# Altium PCB betterfc_v0.2.PcbDoc
Units mm, origin at the board's own origin, x right, y up, seen from the top; angles counter-clockwise.
Board outline 26 x 26 mm, 4 copper layers (Top Layer, Layer 1, Layer 2, Bottom Layer), stack 0.603 mm thick; 70 components, 60 nets, 253 pads, 108 vias.
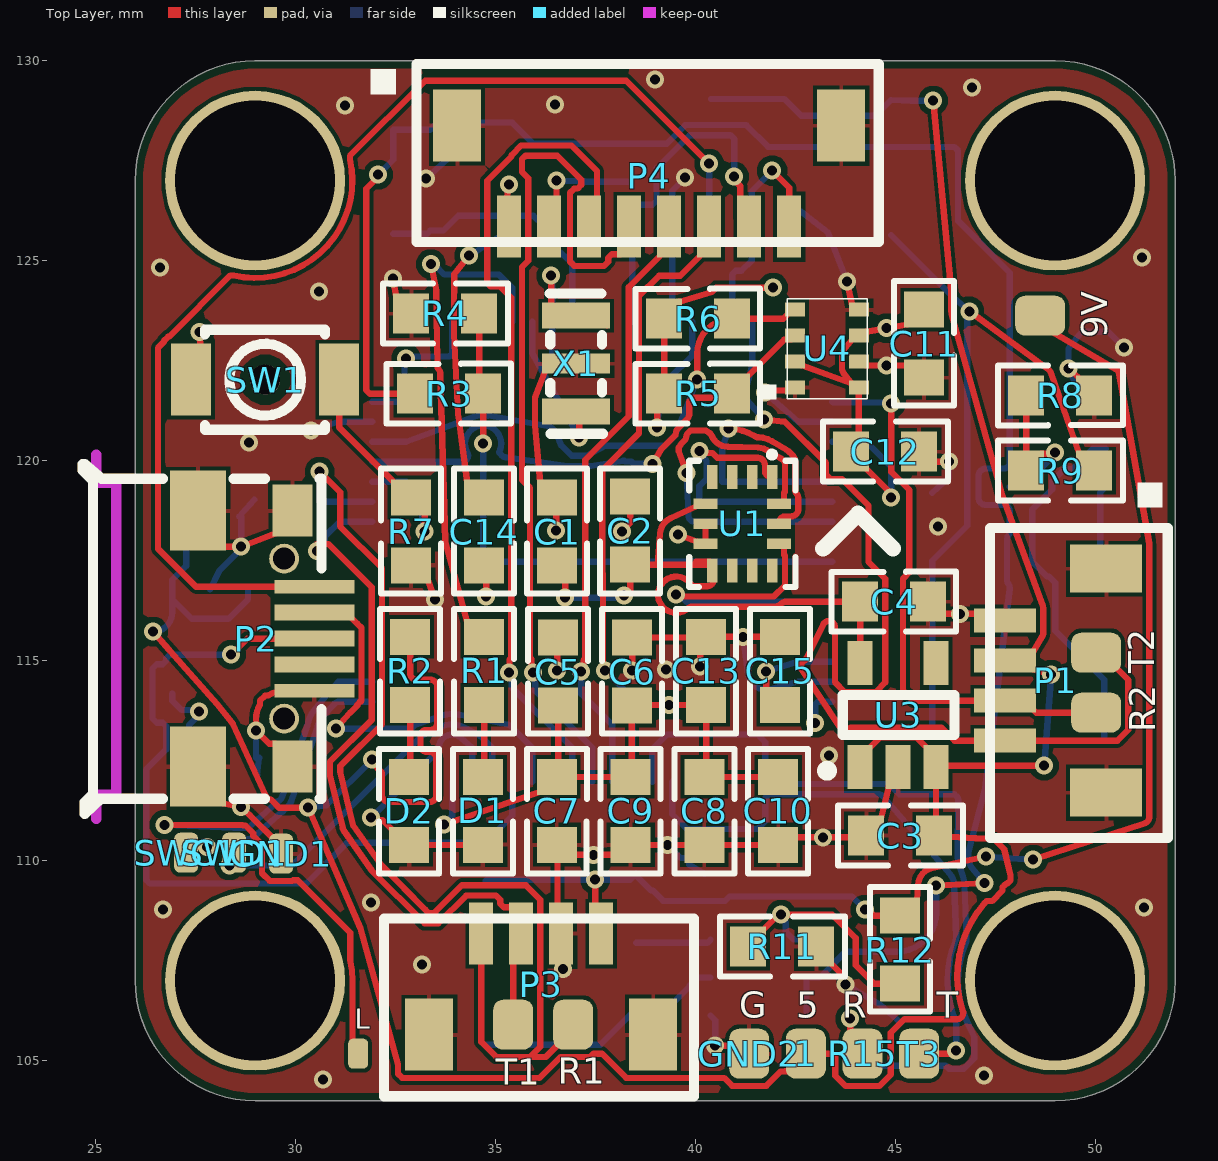
[diagram p0: Top Layer view]
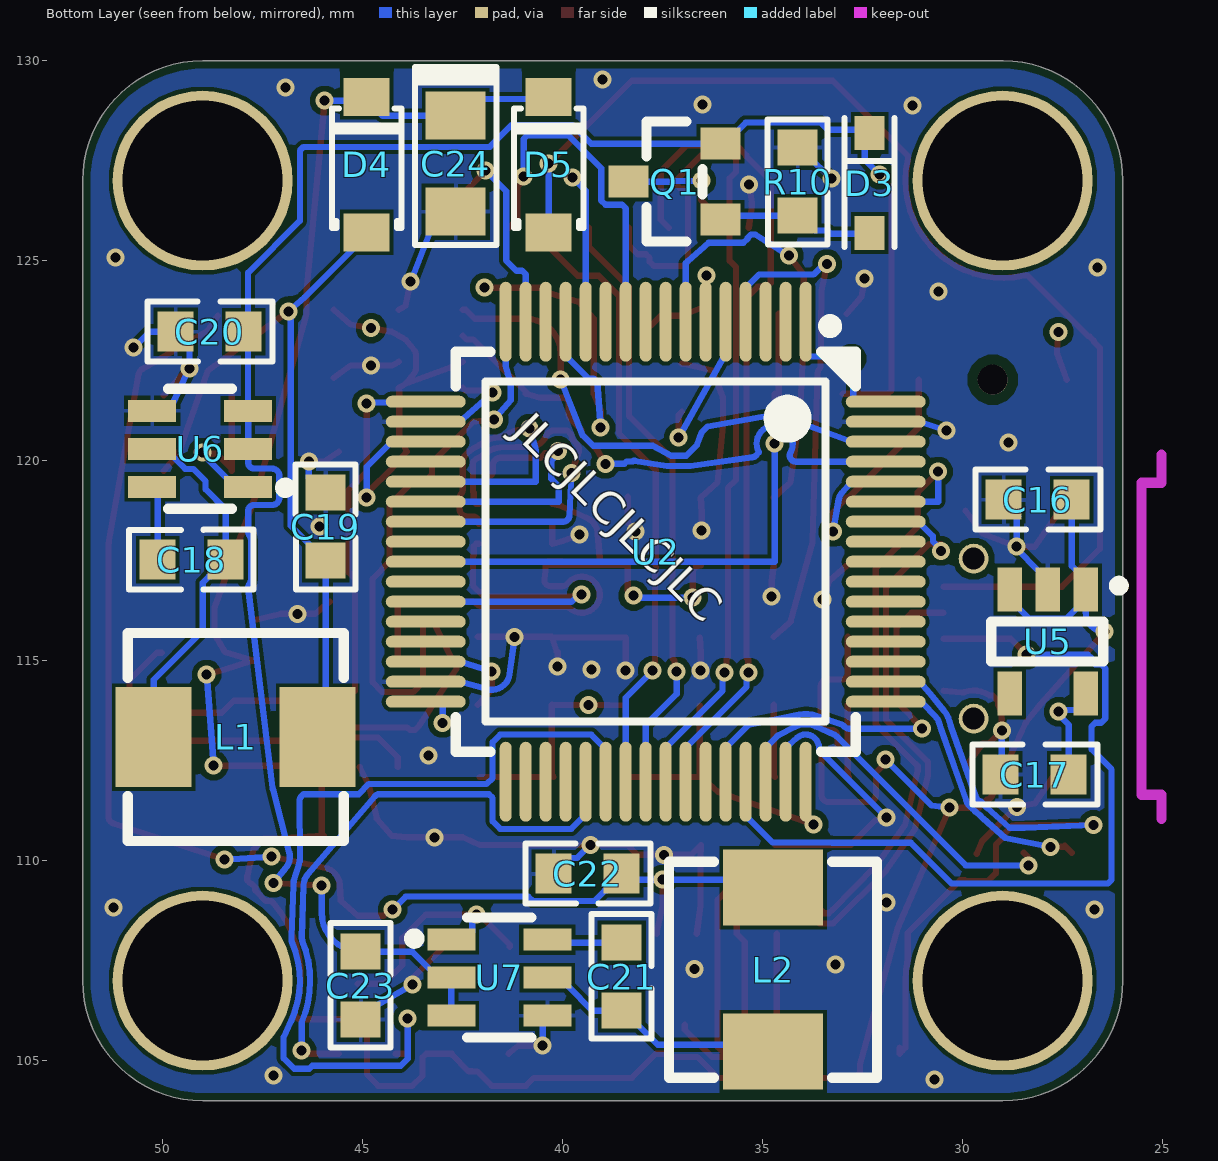
[diagram p1: Bottom Layer view, seen from below]
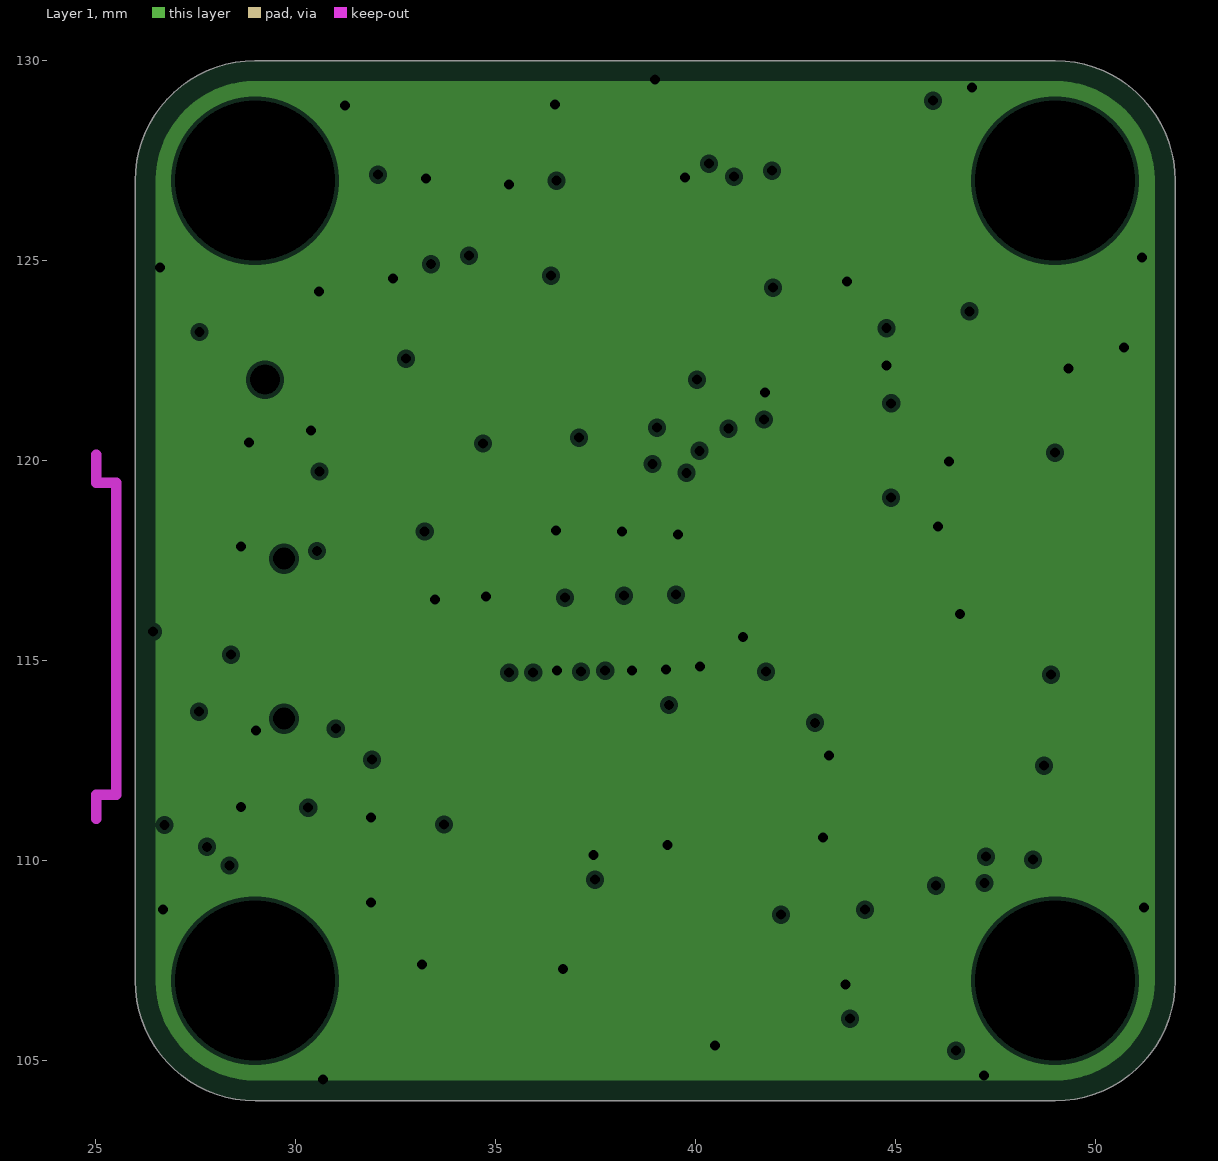
[diagram p2: Layer 1, clearances drawn from the general rule]
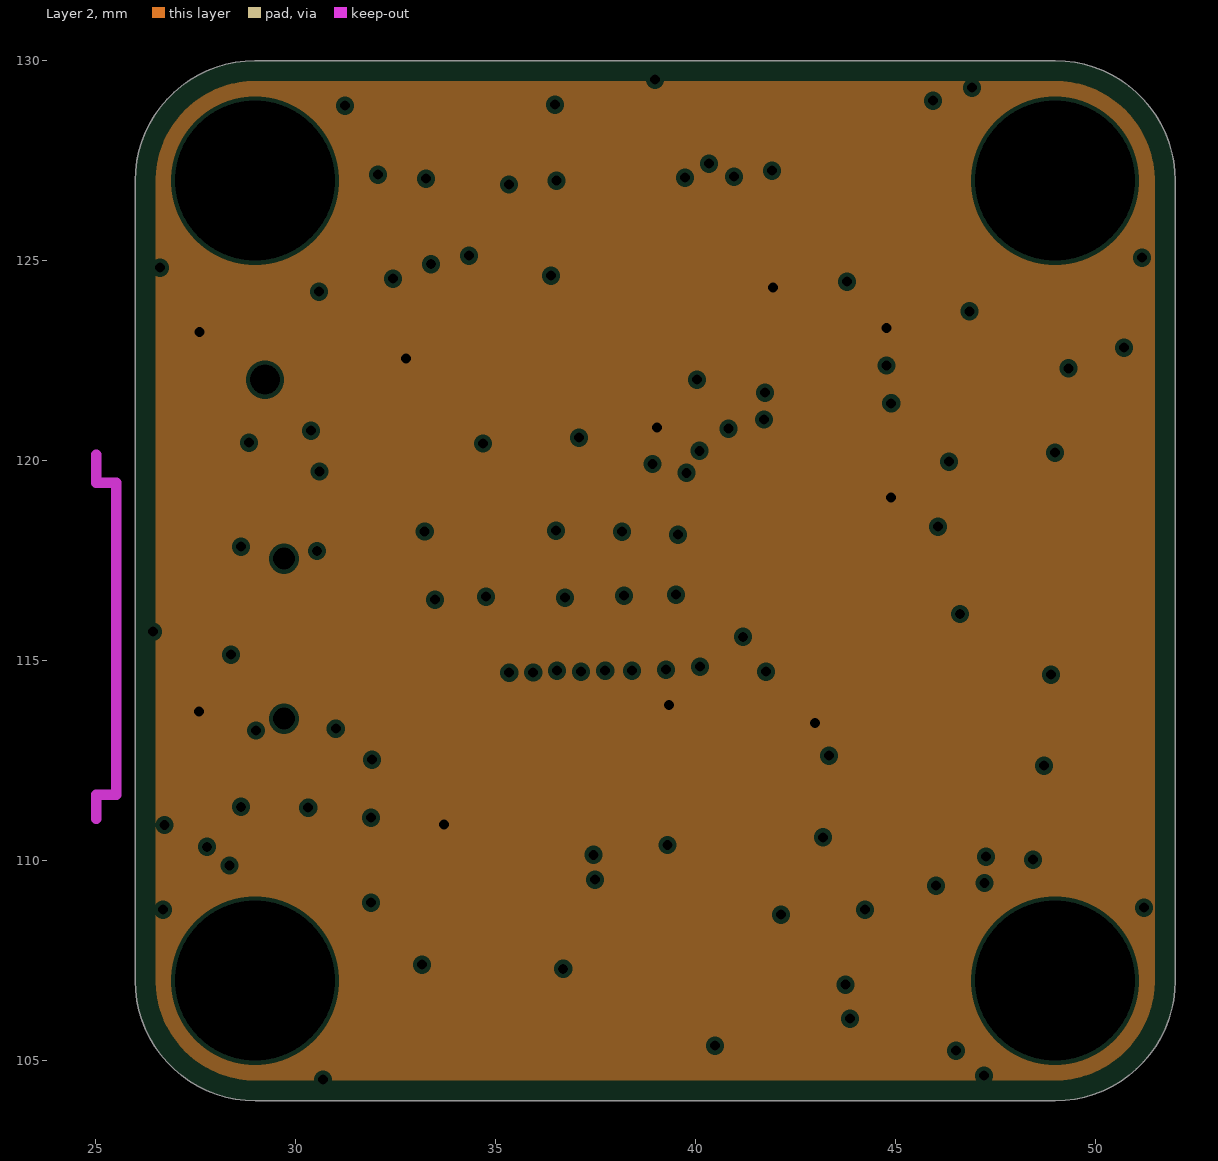
[diagram p3: Layer 2, clearances drawn from the general rule]

## Layer stack, top to bottom
Top Solder: solder mask 0.0102, Solder Resist, Dk 3.5
Top Layer: signal copper 0.0356
Dielectric 2: prepreg 0.0711, PP-006, Dk 4.1
Layer 1: plane copper 0.035, net GND
Dielectric 1: dielectric 0.32, FR-4, Dk 4.8
Layer 2: plane copper 0.035, net 3V3
Dielectric 3: prepreg 0.0711, PP-006, Dk 4.1
Bottom Layer: signal copper 0.0356
Bottom Solder: solder mask 0.0102, Solder Resist, Dk 3.5

## Board outline
29,104 cw(c29,107) 26,107 26,127 cw(c29,127) 29,130 49,130 cw(c49,127) 52,127 52,107 cw(c49,107) 49,104

## Design rules (kind name [scope] priority, off if disabled: settings)
BoardOutlineClearance [All] p1: gap=0.2 ignorepadtopadclearanceinfootprint=FALSE
Clearance [All] p1: gap=0.102 ignorepadtopadclearanceinfootprint=FALSE except(0.127: Arc-Via Track-Via SMDPad-Via THPad-Via Via-Via Via-Fill Via-Poly Via-Region Via-Text; 0.25: Arc-Hole Track-Hole SMDPad-Hole THPad-Hole Via-Hole Fill-Hole Poly-Hole Region-Hole Text-Hole)
ComponentClearance [All] p1: gap=0.102 collisioncheckmode=3 verticalgap=0.102 showdistances=TRUE
DiffPairsRouting [All] p1: maxlimit=0.102 minlimit=0.102 mostfreqgap=0.102 toplayer_minwidth=0.102 toplayer_maxwidth=1816.048 toplayer_prefwidth=0.102 bottomlayer_minwidth=0.102 bottomlayer_maxwidth=1816.048 bottomlayer_prefwidth=0.102 maxuncoupledlength=12.7
Height [All] p1: minheight=0 maxheight=1816.048 prefheight=12.7
HoleSize [All] p1: absolutevalues=TRUE maxlimit=6.3 minlimit=0.2 maxpercent=80.000 minpercent=20.000
HoleToHoleClearance [All] p1: gap=0.25 allowstackedmicrovias=FALSE
MinimumAnnularRing [All] p1: minimumring=0.076
MinimumSolderMaskSliver [All] p1: minsoldermaskwidth=0
PlaneClearance [All] p1: clearance=0.102
PlaneConnect PlaneConnectPowerPads [InPadClass('PowerPads')] p1: planeconnectstyle=Direct reliefexpansion=0.508 reliefentries=4 reliefconductorwidth=0.254 reliefairgap=0.254
PlaneConnect [All] p2: pad.planeconnectstyle=Relief pad.reliefexpansion=0.3 pad.reliefentries=4 pad.reliefconductorwidth=0.102 pad.reliefairgap=0.102 via.planeconnectstyle=Direct via.reliefexpansion=0.3 via.reliefentries=4 via.reliefconductorwidth=0.127 via.reliefairgap=0.127
PolygonConnect PolygonConnectPowerPads [All vs (InPadClass('PowerPads'))] p1: connectstyle=Direct reliefconductorwidth=0.254 reliefentries=4 polygonreliefangle="90 Angle" airgapwidth=0.254
PolygonConnect [All] p2: thpad.connectstyle=Relief thpad.reliefconductorwidth=0.102 thpad.reliefentries=4 thpad.polygonreliefangle="90 Angle" thpad.airgapwidth=0.102 smdpad.connectstyle=Relief smdpad.reliefconductorwidth=0.102 smdpad.reliefentries=4 smdpad.polygonreliefangle="90 Angle" smdpad.airgapwidth=0.102 via.connectstyle=Direct via.reliefconductorwidth=0.127 via.reliefentries=4 via.polygonreliefangle="90 Angle" via.airgapwidth=0.127
RoutingVias [All] p1: holewidth=0.2 width=0.45 viastyle="Through Hole" minholewidth=0.2 minwidth=0.45 maxholewidth=6.3 maxwidth=6.55
SilkToSilkClearance [All] p1: silktosilkclearance=0
SilkToSolderMaskClearance [IsPad] p1: minsilkscreentomaskgap=0.102 clearancetoexposedcopper=TRUE
SolderMaskExpansion [All] p1: expansion=0.075 istentingtop=FALSE
Width [All] p1: maxlimit=1816.048 minlimit=0.155 preferedwidth=0.155 minimp=50.000000 maximp=50.000000 favimp=50.000000
20 further rules are at their usual default settings.

## Components (designator, comment, footprint, x,y, rotation, side; value= is the part's Value field where it differs from the comment)
1 "PAD" pad#1 42.767,105.175 r0 top
9V "PAD" pad#1 48.625,123.625 r90 top
C1 "100nF" 0603 43.598,124.225 r90 top
C2 "100nF" 0603 31.327,112.255 r270 top
C3 "1uF (X7R)" 0603 51.12,103.577 r0 top
C4 "1uF (X7R)" 0603 38.98,123.523 r180 top
C5 "100nF" 0603 43.623,120.723 r90 top
C6 "100nF" 0603 45.473,120.723 r90 top
C7 "100nF" 0603 29.492,105.25 r270 top
C8 "100nF" 0603 33.182,105.25 r270 top
C9 "100nF" 0603 31.337,105.25 r270 top
C10 "4.7uF" 0603 35.027,105.25 r270 top
C11 "100nF" 0603 52.773,128.92 r90 top
C12 "100nF" 0603 50.745,113.177 r0 top
C13 "100nF" 0603 33.227,108.753 r270 top
C14 "1uF" 0603 41.773,124.225 r90 top
C15 "2.2uF" 0603 35.077,108.753 r270 top
C16 "1uF (X7R)" 0603 22.13,111.977 r180 bottom
C17 "1uF (X7R)" 0603 22.205,105.102 r180 bottom
C18 "100nF" 0603 55.27,124.573 r0 bottom
C19 "22uF" 0603 52.973,112.355 r270 bottom
C20 "10uF" 0603 42.83,116.177 r180 bottom
C21 "100nF" 0603 31.477,113.095 r90 bottom
C22 "22uF" 0603 33.38,102.627 r180 bottom
C23 "10uF" 0603 38.002,112.87 r90 bottom
C24 "100uF" "polorizedC - duplicate" 42.675,127.425 r90 bottom
D1 "LED1 (Blue - Status)" 0603 27.647,105.25 r270 top
D2 "LED2 (Red - PWR)" 0603 25.802,105.25 r270 top
D3 "Zenerdiode" Zenerdiode 32.325,125.692 r90 bottom (schematic designator D4)
D4 "B5819W_C305445" scottydiode 44.975,127.776 r90 bottom (schematic designator D3)
D5 "B5819W_C305445" scottydiode 40.424,127.776 r90 bottom
GND1 "PAD" pad#2 29.65,110.175 r0 top
GND2 "PAD" pad#1 41.35,105.175 r180 top
L "PAD" pad#3 31.575,105.175 r0 top
L1 "4.7uH" coil 48,112.65 r180 bottom
L2 "4.7uH" coil 34.3,107.45 r90 bottom
P1 "RXplug" RXplug 46.861,102.062 r270 top
P2 "MicroUSB" microUSB 31.072,119.766 r180 top
P3 "VTXplug" VTXplug 30.951,104.746 r180 top (schematic designator P1)
P4 "ESCplug" ESCplug 38.366,125.85 r0 top (schematic designator P3)
Q1 "mosfet" mosfet 36.95,127 r180 bottom
R1 "150" 0603 27.677,108.753 r270 top (schematic designator R2)
R1 "PAD" pad#1 36.95,105.9 r180 top
R2 "150" 0603 25.827,108.753 r270 top (schematic designator R4)
R2 "PAD" pad#1 50.025,113.7 r90 top
R3 "10k" 0603 27.855,128.723 r180 top (schematic designator R1)
R4 "1k" 0603 39.745,116.627 r0 top (schematic designator R3)
R5 "1k" 0603 34.08,128.723 r180 top
R6 "1k" 0603 34.08,130.598 r180 top
R7 "10k" 0603 39.948,124.225 r90 top
R8 "30k" 0603 55.12,114.587 r0 top
R9 "157k" 0603 55.12,112.702 r0 top
R10 "100k" 0603 41.173,120.98 r270 bottom
R11 "20k" 0603 48.17,100.802 r0 top
R12 "205k" 0603 52.173,113.77 r90 top
R15 "PAD" pad#1 44.183,105.175 r180 top
SW1 "button" button 32.996,121.791 r0 top
SWC1 "PAD" pad#2 27.275,110.2 r180 top
SWD1 "PAD" pad#2 28.475,110.2 r180 top
T1 "PAD" pad#1 35.45,105.9 r0 top
T2 "PAD" pad#1 50.025,115.2 r90 top
T3 "PAD" pad#1 45.6,105.175 r180 top
U1 "BMI270" bmi270 41.275,118.05 r90 top
U2 "stm32f722" STM32F722RET6 37.275,117.617 r0 bottom
U3 "AP2112K-3.3TRG1" LDO 44.95,113.825 r270 top
U4 "bmp280" bmp280 43.3,122.8 r180 top
U5 "AP2112K-3.3TRG1" LDO 27.75,115.3 r90 bottom
U6 "AP63205WU-7" AP63205WU-7 48.925,120.225 r90 bottom
U7 "AP63205WU-7" AP63205WU-7 41.725,107.15 r270 bottom
X1 "8Mhz" crystal 38.51,122.45 r90 top

## Footprints (in the part's own frame and the unit in brackets; to place one, negate y for a bottom-side part, rotate by r counter-clockwise, add the part's x,y. Pads: shape width x height; smd on the part's side, far side on the other; paste and mask are expansions set on the pad)
0603 [mm]
  rect 0.9x1 smd paste+0 mask+0.051: 1(-6.845,7.048) 2(-5.145,7.048)
  silkscreen extent -7.54,6.3 -4.43,7.8
AP63205WU-7 [mm]
  rect 0.55x1.2 smd paste+0 mask+0.051: 1(-0.877,-1.061) 2(0.073,-1.061) 3(1.022,-1.061) 4(1.022,1.339) 5(0.073,1.339) 6(-0.877,1.339)
  silkscreen extent -1.43,-2.11 1.57,0.94
bmi270 [mm]
  rect 0.6x0.27 smd paste+0 mask+0.051: 1(1.543,-0.654) 2(1.543,-0.154) 3(1.543,0.346) 4(1.543,0.846) 8(-0.797,0.846) 9(-0.797,0.346) 10(-0.797,-0.154) 11(-0.797,-0.654)
  rect 0.27x0.6 smd paste+0 mask+0.051: 5(0.873,1.016) 6(0.373,1.016) 7(-0.127,1.016) 12(-0.127,-0.824) 13(0.373,-0.824) 14(0.873,-0.824)
  silkscreen extent -1.2,-1.23 2.18,1.42
bmp280 [mm]
  rect 0.5x0.35 smd: 1(0.8,0.975) 2(0.8,0.325) 3(0.8,-0.325) 4(0.8,-0.975) 5(-0.8,-0.975) 6(-0.8,-0.325) 7(-0.8,0.325) 8(-0.8,0.975)
  silkscreen extent -1,-1.25 1.65,1.27
button [mm]
  rect 1x1.8 smd paste+0 mask+0.051: 1(-5.596,0.234) 2(-1.896,0.234)
  round 0.75 hole 0.75 unplated paste+0: ""(-3.746,0.234)
  silkscreen extent -5.25,-1.02 -2.25,1.48
coil [mm]
  rect 1.9x2.5 smd paste+0 mask+0.051: 1(-2.225,0.441) 2(1.875,0.441)
  silkscreen extent -2.87,-2.16 2.53,3.04
crystal [mm]
  rect 0.65x1.7 smd paste+0 mask+0.051: 1(-1.225,1.485) 3(1.175,1.485)
  rect 0.5x1.7 smd paste+0 mask+0.051: 2(-0.025,1.485)
  silkscreen extent -1.78,0.82 1.73,2.15
ESCplug [mm]
  rect 0.6x1.55 smd: 1(-3.016,0) 2(-2.016,0) 3(-1.016,0) 4(-0.016,0) 5(0.984,0) 6(1.984,0) 7(2.984,0) 8(3.984,0)
  rect 1.2x1.8 smd: 9(-4.316,2.525) 10(5.284,2.525)
  silkscreen extent -6.48,-0.38 6.22,4.06
LDO [mil]
  rect 43.5x24.5 smd paste+0 mask+2: 1(58.25,-32.48) 2(58.25,4.89) 3(58.25,42.3) 4(-44.11,42.3) 5(-44.11,-32.48)
  silkscreen extent -13,-70 67,60
microUSB [mm]
  rect 2x0.34 smd paste+0 mask+0.051: 1(0.592,2.916) 5(0.592,5.516)
  rect 2x0.4 smd paste+0 mask+0.051: 2(0.592,3.566) 3(0.592,4.216) 4(0.592,4.866)
  rect 1x1.3 smd paste+0 mask+0.051: 6(1.143,1.016) 9(1.143,7.416)
  rect 1.4x2 smd paste+0 mask+0.051: 7(3.497,1.016) 8(3.497,7.416)
  round 0.75 hole 0.55 unplated paste+0: ""(1.347,6.216) ""(1.347,2.216)
  Keep-Out Layer lines w0.254: 6.045,8.716 6.045,8.116 5.545,8.116 5.545,8.016 5.545,0.316 6.045,0.316 6.045,-0.384
  silkscreen extent 0.41,-0.15 6.38,8.59
mosfet [mm]
  rect 1x0.8 smd paste+0 mask+0.051: 1(0.895,-0.974) 2(0.895,0.926) 3(-1.405,-0.024)
  silkscreen extent -0.96,-1.52 0.44,1.48
pad#1 [mm]
  rrect50% 1x1.25 smd: 1(0,0)
pad#2 [mm]
  rrect50% 0.6x1 smd: 1(0,0)
pad#3 [mm]
  rrect50% 0.5x0.75 smd: 1(0,0)
"polorizedC - duplicate" [mm]
  rect 1.2x1.5 smd paste+0 mask+0.051: 1(-1.2,0) 2(1.2,0)
  silkscreen extent -2.03,-1.02 2.41,1.02
RXplug [mm]
  rect 0.6x1.55 smd: 1(-13.938,0.889) 2(-12.938,0.889) 3(-11.938,0.889) 4(-10.938,0.889)
  rect 1.2x1.8 smd: 5(-15.238,3.414) 6(-9.638,3.414)
  silkscreen extent -17.4,0.51 -8.51,4.95
scottydiode [mm]
  rect 0.95x1.15 smd paste+0 mask+0.051: 1(-2.065,-0.074) 2(1.32,-0.074)
  silkscreen extent -1.95,-0.94 1.03,0.79
STM32F722RET6 [mm]
  oval 0.3x2 smd paste+0 mask+0.051: 1(-3.35,-5.858) 2(-2.85,-5.858) 3(-2.35,-5.858) 4(-1.85,-5.858) 5(-1.35,-5.858) 6(-0.85,-5.858) 7(-0.35,-5.858) 8(0.15,-5.858) 9(0.65,-5.858) 10(1.15,-5.858) 11(1.65,-5.858) 12(2.15,-5.858) 13(2.65,-5.858) 14(3.15,-5.858) 15(3.65,-5.858) 16(4.15,-5.858) 33(4.15,5.642) 34(3.65,5.642) 35(3.15,5.642) 36(2.65,5.642) 37(2.15,5.642) 38(1.65,5.642) 39(1.15,5.642) 40(0.65,5.642) 41(0.15,5.642) 42(-0.35,5.642) 43(-0.85,5.642) 44(-1.35,5.642) 45(-1.85,5.642) 46(-2.35,5.642) 47(-2.85,5.642) 48(-3.35,5.642)
  oval 2x0.3 smd paste+0 mask+0.051: 17(6.15,-3.858) 18(6.15,-3.358) 19(6.15,-2.858) 20(6.15,-2.358) 21(6.15,-1.858) 22(6.15,-1.358) 23(6.15,-0.858) 24(6.15,-0.358) 25(6.15,0.142) 26(6.15,0.642) 27(6.15,1.142) 28(6.15,1.642) 29(6.15,2.142) 30(6.15,2.642) 31(6.15,3.142) 32(6.15,3.642) 49(-5.35,3.642) 50(-5.35,3.142) 51(-5.35,2.642) 52(-5.35,2.142) 53(-5.35,1.642) 54(-5.35,1.142) 55(-5.35,0.642) 56(-5.35,0.142) 57(-5.35,-0.358) 58(-5.35,-0.858) 59(-5.35,-1.358) 60(-5.35,-1.858) 61(-5.35,-2.358) 62(-5.35,-2.858) 63(-5.35,-3.358) 64(-5.35,-3.858)
  silkscreen extent -4.6,-5.9 5.4,4.89
VTXplug [mm]
  rect 0.6x1.55 smd: 1(-6.699,-3.429) 2(-5.699,-3.429) 3(-4.699,-3.429) 4(-3.699,-3.429)
  rect 1.2x1.8 smd: 5(-7.999,-0.904) 6(-2.399,-0.904)
  silkscreen extent -9.02,-3.81 -1.27,0.63
Zenerdiode [mm]
  rect 0.85x0.75 smd: 1(0,0) 2(2.5,0)
  silkscreen extent -0.35,-0.63 2.88,0.63

## Part data
C1 C2 C3 C4 C5 C6 C7 C8 C9 C10 C11 C12 C13 C14 C15 C16 C17 C18 C19 C20 C21 C22 C23: library part C
C24: library part "polorized C"
D1 D2: library part LED
D4 D5: library part ScottyDiode
L1 L2: library part coil
P2: library part USB-C_1
R1 R2 R3 R4 R5 R6 R7 R8 R9 R10 R11 R12: library part R
U3 U5: library part LDO
X1: library part Crystal

## Free pads (board coordinates)
  round 4.5 hole 4: ""(29,107) ""(29,127) ""(49,107) ""(49,127)

## Via types
v1: diameter 0.45, hole 0.25, Top Layer to Bottom Layer, 108 vias

## Nets (pads, with @x,y where several pads share a name; then routed paths per layer and width w, separated by ;. In a path a pad name is that pad's centre, name@x,y a point inside that pad or via, vN(x,y) a via of type N, cw(c..) or ccw(c..) an arc to the next point about the centre after c; other vN are vias at no path point)
3V3: C5.1 C6.1 C7.1 C8.1 C9.1 C10.1 C11.2 C12.1 C13.2 C17.2 R5.2 R6.2 SW1.1 U2.1 U2.13 U2.19 U2.32 U2.48 U2.64 U4.2 U4.6 U4.8 U5.5 | length 43.3
  Top Layer w0.155: SW1.1 27.64,122.683 27.64,122.774 v1(27.607,123.218) ; v1(33.725,110.907) 36.118,111.722 C7.1 C9.1 38.417,112.467 38.417,113.505 C6.1 38.847,113.893 v1(39.35,113.893) 39.852,113.893 C13.2 C8.1@40.275,112.14 ; C7.1@36.575,112.13 C5.1 ; v1(39.05,120.825) 39.05,121.253 R5.2 R6.2 39.597,123.972 40.423,124.221 40.527,124.325 v1(41.95,124.325) ; C8.1 C8.1@40.275,112.14 ; C10.1 40.32,112.095 C8.1@40.275,112.14 ; U4.2 42.672,122.377 U4.8@43.928,121.923 ; v1(44.9,119.075) 44.844,119.131 44.844,119.231 44.272,119.803 C12.1 44.088,120.647 44.088,121.728 U4.8 U4.8@43.928,121.923 ; C11.2 45.303,123.403 v1(44.788,123.313) 44.272,123.223 U4.6 43.928,123.028 43.711,122.763 ccw(c43.85,122.65) 43.671,122.65 43.671,122.3 ccw(c43.85,122.3) 43.711,122.187 U4.8@43.928,121.923
  Bottom Layer w0.155: U5.5 26.925,113.999 27.159,113.766 27.559,113.766 v1(27.6,113.725) ; C17.2 27.35,113.395 27.6,113.645 v1@27.6,113.675 ; U2.64 32.669,121.475 32.736,121.542 32.736,122.414 32.798,122.475 v1@32.85,122.475 ; v1(32.775,122.55) v1@32.85,122.475 ; v1(33.725,110.907) 33.925,111.125 U2.48 ; U2.1 33.925,122.673 33.858,122.606 32.911,122.606 32.85,122.545 v1@32.85,122.475 ; v1(39.05,120.825) 39.137,121.966 39.183,122.011 39.228,122.056 39.356,122.056 39.925,122.625 U2.13 ; v1(43,113.447) 43,113.908 43.067,113.975 U2.32 ; U2.19 44.275,120.475 44.9,119.85 v1(44.9,119.075)
3V3_IMU: C1.1 C2.2 C4.2 U1.5 U1.8 U3.5 | length 17.2
  Top Layer w0.155: C1.1 cw(c36.55,117.18) 36.75,117.18 v1(36.75,116.575) ; v1(38.225,116.625) ccw(c38.225,116.775) 38.375,116.775 C2.2 39.062,117.4 ; 40.018,117.476 40.371,117.476 40.429,117.418 U1.8 40.458,117.031 40.458,116.999 cw(c40.304,117.018) 40.305,116.863 40.007,116.863 cw(c40.008,117.018) 39.886,116.923 ccw(c39.525,116.65) 39.825,116.312 cw(c39.927,116.195) 39.926,116.35 41.971,116.35 ccw(c41.971,116.606) 42.153,116.425 42.157,116.43 cw(c42.266,116.32) 42.266,116.475 C4.2 U3.5 ; U1.5@40.094,118.923 U1.5 40.037,118.865 39.383,118.56 ccw(c39.575,118.15) 39.124,118.185 39.062,117.4 ; U1.8@40.371,117.4 39.062,117.4
  Bottom Layer w0.155: v1(36.75,116.575) 38.175,116.575 ccw(c38.175,116.625) v1(38.225,116.625)
4V5: D5.1 P2.1 | length 29.4
  Top Layer w0.155: P2.1 27.521,116.85 26.571,117.8 26.571,122.821 26.721,122.971 26.721,122.999 26.826,123.104 26.854,123.104 28.381,124.631 28.445,124.631 28.462,124.631 ccw(c29,127) 31.369,127.538 31.369,127.555 31.369,127.619 33.25,129.5 38.275,129.5 v1(40.35,127.425)
  Bottom Layer w0.155: v1(40.35,127.425) D5.1 D5.1@40.401,125.66
5V: 1.1 C3.2 C16.2 C24.2 D4.2 D5.2 P1.2 R2.1@32.875,115.597 U3.1 U3.3 U5.1 U5.3 | length 84.3
  Top Layer w0.155: v1(26.45,115.725) 26.843,115.272 26.875,115.235 28.053,113.912 28.411,113.465 cw(c28.275,113.35) 28.437,113.425 29.266,111.625 ccw(c29.429,111.7) 29.397,111.523 29.596,111.325 29.791,111.325 v1(30.326,111.324) 31.632,108.306 32.571,104.911 32.571,104.676 32.676,104.571 36.109,104.571 36.634,105.096 37.378,105.096 37.457,105.175 37.65,105.175 37.672,105.175 38.276,104.571 40.722,104.571 40.922,104.371 41.778,104.371 42.14,104.733 42.253,104.733 ; v1(31.925,112.525) 31.925,112.445 32.171,112.199 32.171,111.645 ccw(c32.35,111.645) 32.35,111.466 33.35,111.466 ccw(c33.35,111.645) 33.529,111.645 33.529,112.545 ccw(c33.35,112.545) 33.35,112.724 33.287,112.724 cw(c33.287,112.879) 33.132,112.879 33.132,113.113 cw(c33.287,113.113) 33.287,113.268 33.375,113.268 ccw(c33.375,113.447) 33.554,113.447 33.554,114.347 ccw(c33.375,114.347) 33.375,114.527 33.03,114.527 cw(c33.03,114.682) 32.875,114.682 R2.1@32.875,115.597 ; 42.254,104.734 42.357,104.734 42.767,105.143 1.1 43.413,105.175 43.504,105.084 43.504,104.622 43.756,104.371 44.611,104.371 44.892,104.651 44.892,105.699 45.23,106.037 46.545,106.037 ; U3.1 44.125,112.587 44.615,113.077 45.534,113.077 46.024,112.587 U3.3 ; v1(45.95,129) 46.403,124.242 cw(c46.225,124.225) 46.404,124.225 46.404,123.736 ccw(c46.857,123.736) 46.421,123.615 47.653,119.202 ccw(c47.825,119.25) 47.657,119.188 48.693,116.362 cw(c48.525,116.3) 48.704,116.3 48.704,115.7 cw(c48.525,115.7) 48.679,115.608 48.448,115.223 P1.2 48.448,114.778 v1(48.9,114.65) ; 46.546,106.037 ccw(c46.545,106.192) 46.655,106.082 ccw(c46.545,106.192) 46.7,106.192 46.7,106.217 cw(c49.332,107.113) 47.235,108.938 cw(c49.332,107.113) 47.238,108.942 47.242,108.945 47.288,108.991 47.422,108.991 47.687,109.256 47.687,109.338 47.732,109.383 ; 47.732,109.384 47.742,109.393 cw(c49.332,107.113) 47.754,109.401 cw(c49.332,107.113) 47.815,109.443 cw(c49.332,107.113) 47.829,109.451 47.84,109.463 47.886,109.508 47.886,109.572 47.886,109.631 47.728,110.287 47.462,110.553 47.017,110.559 47.006,110.56 C3.2 46.024,110.674 U3.3 ; v1(48.725,112.375) 46.258,112.375 U3.3
  Bottom Layer w0.155: v1(26.45,115.725) ccw(c26.45,116.2) 26.925,116.2 U5.1@26.925,116.538 ; C16.2 27.275,117.371 26.925,117.021 U5.1 U5.1@26.925,116.538 ; U5.3 28.824,116.538 28.334,116.048 27.415,116.048 U5.1@26.925,116.538 ; v1(30.326,111.324) 30.781,111.381 v1(31.925,112.525) ; D5.2@40.401,129.045 42.23,129.045 42.65,128.625 44.506,128.625 44.901,129.02 45.399,129 v1(45.95,129) ; v1(48.725,112.375) v1(48.9,114.65)
5V_REG: C19.2 D4.1 L1.2 R9.2 | length 19.1
  Top Layer w0.155: v1(46.857,123.736) 48.831,122.279 cw(c48.725,122.135) 48.894,122.194 49.603,120.172 R9.2
  Bottom Layer w0.155: D4.1@44.901,125.635 46.45,124.086 ccw(c46.559,124.197) 46.458,124.079 v1(46.857,123.736) ; L1.2 45.925,113.291 C19.2 46.8,118.375 v1@46.8,123.736
9V: 9V.1 C22.2 L2.2 P3.1 R12.2 | length 33.3
  Top Layer w0.155: v1(37.5,109.525) 37.5,108.873 P3.1 ; v1(44.25,108.775) 44.327,108.775 44.477,108.625 R12.2 45.547,108.997 45.573,109.404 cw(c46.025,109.375) 45.932,109.818 v1(47.275,110.1) ; v1(48.45,110.025) 51.23,110.93 ccw(c51.175,111.1) 51.354,111.1 51.354,117.9 ccw(c51.175,117.9) 51.351,117.931 50.601,122.166 ccw(c50.425,122.135) 50.515,122.29 48.875,123.25 9V.1
  Bottom Layer w0.155: L2.2@34.766,109.5 34.791,109.525 v1(37.5,109.525) 38.375,109.525 C22.2 38.525,109.625 38.897,109.253 38.947,109.253 39.204,108.996 40.749,108.996 40.856,109.103 43.922,109.103 v1(44.25,108.775) ; v1@47.319,110.17 v1(47.275,110.1) 47.315,110.097 v1(48.45,110.025)
GND: C1.2 C2.1 C3.1 C4.1 C5.2 C6.2 C7.2 C8.2 C9.2 C10.2 C11.1 C12.2 C13.1 C14.1 C15.1 C16.1 C17.1 C19.1 C20.1 C22.1 C23.1 C24.1 D1.2 D2.2 GND1.1 GND2.1 P1.1 P1.5 P1.6 P2.5 P2.6 P2.7 P2.8 P2.9 P3.2 P3.5 P3.6 P4.1 P4.9 P4.10 R4.1 R7.1 R8.2 R10.1 R11.2 U1.6 U1.7 U2.12 U2.18 U2.31 U2.47 U2.63 U3.2 U4.1 U4.5 U4.7 U5.2 U6.4 U7.4 X1.2 | length 82.4
  Top Layer w0.155: P2.8 28.197,111.427 v1(28.642,111.348) ; P2.7 28.197,117.85 v1(28.65,117.85) 29.506,118.177 P2.6 ; v1@28.642,111.275 v1(28.642,111.348) ; GND1.1 29.514,110.493 28.868,111.136 28.733,111.258 v1(28.642,111.348) ; P2.9 29.506,112.922 29.353,112.922 28.975,113.3 29.032,113.357 29.032,113.421 29.032,113.434 cw(c29.725,113.55) 29.12,113.908 29.12,113.998 29.248,114.126 29.335,114.135 cw(c29.725,113.55) 29.961,114.212 ccw(c30.012,114.358) 30.026,114.204 P2.5 ; v1(31.9,111.075) 31.956,111.019 32.176,111.019 32.8,110.395 D1.2 ; v1(32.45,124.55) 32.528,124.097 R4.1 ; R7.1 33.322,117.008 v1(33.5,116.525) ; C14.1 34.775,117.008 v1(34.775,116.6) ; v1(35.345,126.905) 35.272,126.445 35.272,126.37 P4.1@35.35,125.825 ; v1(36.525,118.25) 36.525,118.708 C1.2 36.127,119.453 35.997,120.884 cw(c36.175,120.9) 35.996,120.9 35.996,121.55 cw(c36.175,121.55) 36.008,121.614 36.253,122.253 X1.2 ; v1(36.55,114.75) 36.55,115.205 C5.2 ; P3.2 36.558,108.873 36.558,110.022 C7.2 36.787,110.148 38.138,110.148 C9.2 C8.2 C10.2 42.497,110.586 43.903,110.586 C3.1 44.647,111.047 44.84,111.871 U3.2 ; v1(38.175,118.225) 38.175,118.252 38.375,118.452 C2.1 ; v1(38.425,114.75) 38.425,115.205 C6.2 40.255,115.578 C13.1 ; v1(39.575,118.15) 40.037,117.981 U1.7 U1.6 ; v1(40.125,114.85) 40.125,115.225 40.15,115.225 C13.1 ; v1(40.5,105.375) 41.1,105.375 GND2.1 ; v1(41.75,121.7) 41.806,121.756 42.431,121.756 U4.1 ; C15.1 v1(41.2,115.597) C13.1 ; R11.2 43.025,107.8 43.705,107.12 43.705,106.956 v1(43.761,106.9) ; v1(43.8,124.475) 43.928,123.873 U4.5 ; U4.7 44.272,122.377 45.303,122.377 C11.1 ; C12.2 45.972,119.975 v1(46.347,119.975) ; C4.1 46.197,116.172 47.053,116.172 P1.1 ; v1(49.332,122.311) 49.603,122.057 R8.2
  Bottom Layer w0.155: U5.2 28.108,117.255 28.65,117.796 v1(28.65,117.85) ; v1@28.603,117.878 28.65,117.925 28.65,118.603 28.603,118.603 C16.1 ; v1(29.023,113.252) 29.023,112.572 29.1,112.572 C17.1 ; v1(30.4,120.75) 31.075,120.975 U2.63 ; v1(31.9,111.075) 33.596,112.771 33.596,112.886 33.603,112.894 cw(c33.925,112.825) 34.141,113.073 34.425,112.825 U2.47 ; v1(33.275,127.05) 33.703,127.453 R10.1 ; v1(39.308,110.395) 39.631,110.071 39.853,110.071 39.853,109.9 C22.1 ; U2.12 39.425,126.75 v1(39.75,127.075) ; U7.4 40.5,106.014 v1(40.5,105.375) ; v1(41.2,115.597) 41.327,114.664 ccw(c41.775,114.725) 41.895,114.289 42.575,114.475 U2.31 ; v1(41.75,121.7) 42.575,120.975 U2.18 ; C24.1@42.65,126.225 43.322,125.703 v1(43.8,124.475) ; v1(43.761,106.9) 44.628,106.397 C23.1 ; C19.1 46.347,119.572 v1(46.347,119.975) ; U6.4 49.741,121.445 v1(49.332,122.311) 49.332,122.803 C20.1 50.325,123.225 v1(50.725,122.825)
  other v1: 30.7,104.525 47.225,104.625 36.701,107.299 33.175,107.4 26.7,108.775 51.225,108.825 31.9,108.95 37.463,110.148 43.2,110.586 43.35,112.625 39.275,114.775 46.625,116.172 46.075,118.35 28.85,120.45 44.788,122.377 30.6,124.225 26.625,124.825 51.175,125.075 31.25,128.875 36.5,128.9 46.925,129.325 39,129.525
NetC14_2: C14.2 U2.7 | length 10.9
  Top Layer w0.155: v1(34.347,125.125) 33.975,124.661 33.975,124.212 ccw(c34.15,124.175) 33.971,124.175 33.971,123.175 ccw(c34.15,123.175) 33.971,123.166 34.071,121.166 ccw(c34.25,121.175) 34.072,121.152 34.081,121.091 34.303,119.458 34.346,119.414 C14.2
  Bottom Layer w0.155: v1(34.347,125.125) 35.185,125.654 35.294,125.654 35.34,125.609 35.376,125.573 35.376,125.552 35.481,125.447 36.352,125.447 36.876,124.989 36.879,124.985 36.925,124.939 U2.7
NetC15_2: C15.2 U2.30 | length 2.7
  Top Layer w0.155: v1(41.775,114.725) 41.775,114.27 C15.2
  Bottom Layer w0.155: v1(41.775,114.725) 42.575,114.975 U2.30
NetC18_1: C18.1 L1.1 U6.5 | length 9.1
  Bottom Layer w0.155: L1.1 50.225,114.525 49,115.75 49,116.95 48.847,117.103 48.797,117.103 48.425,117.475 48.425,118.781 48.928,119.284 48.928,119.488 49.234,119.794 49.435,119.794 49.939,120.298 U6.5
NetC18_2: C18.2 U6.6 | length 1.9
  Bottom Layer w0.155: C18.2 50.125,119.209 U6.6
NetC21_1: C21.1 L2.1 U7.5 | length 6.3
  Bottom Layer w0.155: L2.1@34.766,105.4 37.625,105.4 38.475,106.25 C21.1 39.258,106.25 39.864,106.856 39.864,106.88 40.061,107.077 U7.5
NetC21_2: C21.2 U7.6 | length 1.9
  Bottom Layer w0.155: C21.2 40.309,107.95 U7.6
NetD1_1: D1.1 R1.2 | length 1.8
  Top Layer w0.155: D1.1 34.725,112.125 R1.2
NetD2_1: D2.1 R2.2 | length 1.8
  Top Layer w0.155: D2.1 32.875,112.12 R2.2
NetD3_1: D3.1 Q1.1 R10.2 | length 3.8
  Bottom Layer w0.155: D3.1@32.45,125.675 33.299,125.675 33.376,125.753 33.703,125.753 34.075,126.125 35.956,126.125 Q1.1
NetLED_1: L.1 U2.50 | length 16.7
  Top Layer w0.155: v1(26.73,110.896) 28.679,110.896 28.696,110.879 28.761,110.879 28.954,110.686 28.954,110.621 29.171,110.404 29.171,109.689 29.364,109.496 29.936,109.496 29.95,109.51 30.065,109.51 31.375,108.2 31.375,107.524 cw(c29.003,107.001) 31.432,107.001 L.1@31.432,105.318 ; L.1@31.502,105.249 31.577,105.322 L.1
  Bottom Layer w0.155: v1(26.73,110.896) 28.455,110.822 28.83,110.822 29.392,111.326 29.447,111.38 29.448,111.381 29.478,111.411 29.538,111.471 29.538,111.475 ccw(c29.5,111.65) 29.669,111.59 30.293,113.348 ccw(c29.725,113.55) 30.308,113.399 30.329,113.478 cw(c31.015,113.3) 30.465,113.748 30.82,114.183 cw(c31.075,113.975) 30.827,114.192 31.075,114.475 U2.50
NetP1_3: P1.3 R2.1@50.025,113.7 U2.17 | length 14
  Top Layer w0.155: v1(44.901,121.436) 44.901,119.721 45.353,119.269 45.353,117.206 45.196,117.049 45.196,114.247 45.443,114 P1.3 48.225,114 48.525,113.7 R2.1@50.025,113.7
  Bottom Layer w0.155: U2.17 43.444,121.456 44.882,121.456 v1(44.901,121.436)
NetP1_4: P1.4 T2.1 U2.16 | length 27
  Top Layer w0.155: v1(41.72,121.027) 42.239,120.976 43.271,119.944 43.271,119.651 43.376,119.546 43.669,119.546 44.332,118.883 44.332,117.472 44.754,117.049 44.754,114.458 44.51,114.214 43.74,114.214 43.496,114.458 43.496,115.837 ; 43.496,115.837 ccw(c43.341,115.836) 43.202,115.905 42.788,115.068 cw(c42.649,115.137) 42.758,115.027 42.745,115.014 42.654,114.923 42.654,114.795 43.6,113.359 43.691,113.268 43.819,113.268 43.865,113.314 43.885,113.334 46.153,113.334 46.487,113 P1.4 50.557,113 50.829,113.272 50.829,114.521 50.15,115.2 T2.1
  Bottom Layer w0.155: U2.16 41.425,122.381 41.372,122.165 41.297,121.887 41.297,121.513 v1(41.72,121.027)
NetP2_2: P2.2 U2.44 | length 10.2
  Top Layer w0.155: P2.2 31.28,116.2 31.551,115.929 31.554,115.929 31.659,115.824 31.659,114.005 31.551,113.897 31.551,113.876 31.373,113.698 ccw(c31.483,113.589) 31.367,113.692 v1(31.015,113.3)
  Bottom Layer w0.155: v1(31.015,113.3) 32.838,113.3 ccw(c32.838,113.455) 32.947,113.345 32.967,113.365 cw(c33.077,113.256) 33.025,113.402 33.646,113.62 cw(c33.925,112.825) 34.091,113.651 35.306,113.408 cw(c35.275,113.256) 35.384,113.366 ; 35.385,113.365 35.925,112.825 U2.44
NetP2_3: P2.3 U2.45 | length 20.8
  Top Layer w0.155: v1(28.4,115.15) 28.8,115.55 P2.3
  Bottom Layer w0.155: v1(28.4,115.15) 26.934,115.15 26.869,115.15 26.779,115.059 26.779,115.002 26.688,114.911 26.54,114.911 26.435,114.806 26.435,113.553 26.54,113.448 26.688,113.448 26.779,113.357 26.779,112.782 26.277,112.281 26.277,109.52 26.368,109.429 30.278,109.429 31.296,110.447 33.26,110.447 33.267,110.454 34.754,110.454 35.425,111.125 U2.45
NetP3_3: P3.3 T1.1 U2.58 | length 19
  Top Layer w0.155: v1@30.525,117.9 30.546,117.921 30.832,117.921 31.915,116.838 31.915,113.518 30.869,112.472 30.869,112.131 31.191,110.806 31.215,110.757 31.914,109.755 33.237,108.432 33.578,108.432 34.276,109.129 35.024,109.129 35.129,109.024 35.129,108.93 35.22,108.839 35.428,108.839 35.65,108.616 P3.3 35.45,107.975 T1.1
  Bottom Layer w0.155: v1(30.543,117.743) 30.543,117.778 30.746,117.981 30.746,118.111 31.11,118.475 U2.58
NetP3_4: P3.4 R1.1@36.95,105.9 U2.59 | length 27.8
  Top Layer w0.155: v1(30.612,119.727) 31.126,119.213 31.126,118.353 32.172,117.307 32.172,113.412 31.171,112.411 31.126,112.366 31.126,112.237 31.447,110.888 32.171,109.871 33.253,108.779 33.344,108.688 33.472,108.688 33.517,108.734 34.17,109.386 35.768,109.386 36.129,109.024 36.129,105.347 35.878,105.096 ; P3.4 34.65,105.468 35.022,105.096 35.878,105.096 ; R1.1@36.95,105.9 36.95,105.775 36.271,105.096 35.878,105.096
  Bottom Layer w0.155: v1(30.612,119.727) 30.612,118.975 U2.59
NetP4_3: P4.3 U2.42 | length 21
  Top Layer w0.155: v1(35.352,114.7) 35.36,114.708 35.36,115.029 35.404,115.073 35.404,124.074 35.124,124.354 34.891,124.354 34.8,124.445 34.8,127 35.411,127.611 35.411,127.64 35.652,127.882 36.902,127.882 37.549,127.234 37.549,126.024 P4.3@37.35,125.825
  Bottom Layer w0.155: v1(35.352,114.7) 35.408,114.644 35.408,114.342 36.925,112.825 U2.42
NetP4_4: P4.4 U2.41 | length 22.6
  Top Layer w0.155: v1(35.952,114.703) 35.905,114.749 35.905,115.044 35.871,115.078 35.871,119.319 35.667,119.523 35.667,124.839 35.829,125.001 35.829,127.061 35.667,127.223 35.667,127.534 35.758,127.625 36.55,127.625 37.152,127.023 37.152,126.895 37.061,126.804 36.976,126.804 36.871,126.699 36.871,124.976 36.976,124.871 37.724,124.871 37.829,124.976 37.829,125.071 37.92,125.161 38.128,125.161 38.35,125.384 P4.4@38.35,125.825
  Bottom Layer w0.155: v1(35.952,114.703) 36.004,114.65 36.004,114.246 37.425,112.825 U2.41
NetP4_5: P4.5 U2.40 | length 15.1
  Top Layer w0.155: v1(37.15,114.725) 37.206,114.781 37.206,115.006 37.254,115.053 37.254,120.026 38.339,121.111 38.339,124.339 39.35,125.35 P4.5@39.35,125.825
  Bottom Layer w0.155: v1(37.15,114.725) 37.15,114.171 37.925,113.396 U2.40
NetP4_6: P4.6 U2.39 | length 15.4
  Top Layer w0.155: v1(37.752,114.749) 37.696,114.806 37.696,117.183 37.675,117.204 37.675,119.765 38.596,120.686 38.596,124.124 39.098,124.626 39.626,124.626 40.401,125.401 P4.6@40.401,125.66
  Bottom Layer w0.155: v1(37.752,114.749) 37.752,114.748 38.425,114.075 U2.39
NetP4_7: P4.7 U2.10 | length 9
  Top Layer w0.155: v1(40.975,127.1) 40.975,127.02 41.127,126.868 41.127,126.047 P4.7@41.35,125.825
  Bottom Layer w0.155: U2.10 38.425,126.306 38.516,126.397 38.929,126.397 39.034,126.502 39.034,127.309 39.859,128.134 40.884,128.134 40.975,128.044 v1(40.975,127.1)
NetP4_8: P4.8 U2.15 | length 5.9
  Top Layer w0.155: v1(41.925,127.25) 42.35,126.825 P4.8@42.35,125.825
  Bottom Layer w0.155: U2.15 40.925,124.658 41.016,124.749 41.157,124.749 41.412,125.005 41.412,126.737 v1(41.925,127.25)
NetR1_1: R1.1@34.725,115.597 U2.4 | length 12.7
  Top Layer w0.155: v1(33.392,124.912) 33.529,124.249 33.555,122.327 ccw(c33.684,122.413) 33.575,122.304 33.576,122.302 cw(c33.45,122.175) 33.629,122.18 33.753,117.992 33.758,117.957 ; 33.758,117.957 34.301,115.975 34.334,115.943 34.337,115.939 R1.1@34.725,115.597
  Bottom Layer w0.155: v1(33.392,124.912) 33.472,124.912 33.73,124.654 35.096,124.654 35.425,124.325 U2.4
NetR3_1: R3.1 R4.2 U2.25 | length 15
  Top Layer w0.155: R4.2 34.6,121.675 R3.1 v1(34.7,120.427)
  Bottom Layer w0.155: v1(34.7,120.427) 34.7,117.475 U2.25
NetR5_1: R5.1 U2.61 U4.3 | length 13.6
  Top Layer w0.155: v1(38.936,119.92) 39.148,120.283 39.238,120.374 39.503,120.638 39.503,120.641 39.537,120.771 39.805,121.051 ccw(c39.675,121.175) 39.806,121.053 ccw(c39.675,121.175) 39.854,121.175 39.854,121.417 39.854,121.482 39.945,121.573 40.553,121.573 R5.1 40.925,121.725 42.227,123.028 42.402,123.028 U4.3
  Bottom Layer w0.155: U2.61 34.171,119.975 ccw(c34.17,120.13) 34.306,120.205 cw(c34.7,120.427) 35.095,120.206 35.165,120.132 ccw(c35.277,120.238) 35.256,120.085 36.806,119.866 37.394,119.866 38.196,119.997 38.228,119.997 38.244,119.981 38.401,119.981 38.457,119.925 38.931,119.925 v1(38.936,119.92)
NetR6_1: R6.1 U2.62 U4.4 | length 13.5
  Top Layer w0.155: v1(40.05,122.025) 40.05,122.675 cw(c40.925,122.675) R6.1 42.2,123.55 42.425,123.775 U4.4
  Bottom Layer w0.155: U2.62 32.775,120.475 34.455,121.093 cw(c34.7,120.427) 34.821,121.126 ; 34.822,121.126 36.37,120.855 36.382,120.853 36.417,120.818 36.44,120.795 36.441,120.794 36.532,120.703 36.647,120.388 36.913,120.122 37.287,120.122 37.75,120.373 38.863,120.373 ; 38.863,120.372 39.237,120.372 39.503,120.638 v1(40.05,122.025)
NetR7_2: R7.2 SW1.2 U2.60 | length 6.9
  Top Layer w0.155: SW1.2 31.1,120.83 32.85,119.08 R7.2 33.238,118.708 v1(33.238,118.228)
  Bottom Layer w0.155: U2.60 32.775,119.475 33.023,119.192 cw(c32.775,118.975) 33.099,119.031 v1(33.238,118.228)
NetR8_1: R8.1 R9.1 U6.1 | length 4.3
  Top Layer w0.155: R9.1 R9.1@48.275,119.8 ; R8.1 R9.1@48.275,119.8 ; v1(49,120.2) 48.972,120.172 48.647,120.172 R9.1@48.275,119.8
  Bottom Layer w0.155: U6.1 48.189,119.348 49,120.159 v1(49,120.2)
NetR11_1: R11.1 R12.1 U7.1 | length 6.3
  Top Layer w0.155: R11.1 41.325,107.9 42.075,108.65 v1(42.15,108.65) 43.428,108.65 44.012,108.066 44.012,107.388 44.475,106.925 R12.1
  Bottom Layer w0.155: v1(42.15,108.65) 42.15,108.57 42.264,108.457 42.264,108.225 42.461,108.027 U7.1
NetR15_1: R15.1 U2.38 | length 21.9
  Top Layer w0.155: v1(43.875,106.05) 43.875,105.175 R15.1
  Bottom Layer w0.155: U2.38 38.925,112.79 39.289,113.154 41.561,113.154 41.754,112.961 41.754,112.066 41.902,111.918 44.844,111.918 45.101,111.662 46.48,111.662 46.533,111.609 46.534,111.608 cw(c46.423,111.5) 46.578,111.498 46.566,110.106 ccw(c47.275,110.1) 46.605,109.868 46.695,109.607 cw(c46.025,109.375) 46.734,109.4 46.781,108.089 cw(c46.37,108.074) 46.782,108.072 46.782,108.021 cw(c46.627,108.022) 46.769,107.961 ccw(c49,107) 46.795,105.981 46.978,105.587 46.978,105.063 46.712,104.797 46.338,104.797 46.26,104.875 44.05,104.875 43.875,105.05 v1(43.875,106.05)
NetSWC1_1: SWC1.1 U2.49 | length 6.8
  Top Layer w0.155: SWC1.1 27.45,110.375 27.478,110.347 v1(27.8,110.347)
  Bottom Layer w0.155: v1(27.8,110.347) 28.936,110.566 29.484,111.053 29.578,111.143 29.673,111.218 29.756,111.297 ccw(c29.5,111.65) 29.911,111.505 30.533,113.257 30.533,113.259 ccw(c29.725,113.55) 30.557,113.336 30.577,113.413 cw(c31.015,113.3) 30.688,113.613 30.989,113.927 cw(c31.101,113.82) U2.49@31.099,113.975 ; U2.49@31.1,113.975 U2.49
NetSWD1_1: SWD1.1 U2.46 | length 9.4
  Top Layer w0.155: v1(28.357,109.882) 28.357,110.082 SWD1.1
  Bottom Layer w0.155: v1(28.357,109.882) 29.922,109.882 33.149,113.109 cw(c33.258,112.999) 33.195,113.141 33.686,113.36 cw(c33.925,112.825) 34.192,113.346 34.602,113.137 cw(c34.532,112.999) 34.641,113.109 34.925,112.825 U2.46
NetT3_1: T3.1 U2.37 | length 15
  Top Layer w0.155: T3.1 46.525,105.175 v1(46.525,105.25)
  Bottom Layer w0.155: U2.37 39.425,111.16 39.789,110.796 41.561,110.796 41.754,110.989 41.754,111.571 41.845,111.662 44.584,111.662 cw(c44.583,111.507) 44.701,111.608 46.367,109.671 cw(c46.025,109.375) 46.477,109.389 46.525,108.079 cw(c46.37,108.073) 46.514,108.016 ; 46.514,108.015 ccw(c49,107) 46.525,105.957 v1(46.525,105.25)
NetU1_1: U1.1 U2.22 | length 7
  Top Layer w0.155: v1(40.112,120.248) 40.168,120.191 40.435,120.191 40.554,120.072 40.73,120.072 41.169,120.072 41.564,120.072 cw(c41.564,119.893) 41.743,119.893 41.743,119.748 ccw(c41.898,119.748) 41.847,119.602 41.872,119.602 U1.1
  Bottom Layer w0.155: v1(40.112,120.248) 40.112,120.168 40.284,119.996 40.284,119.551 40.1,119.367 40.1,118.975 U2.22
NetU1_12: U1.12 U2.27 | length 8
  Top Layer w0.155: v1(39.525,116.65) 39.569,116.606 41.971,116.606 42.243,116.879 42.243,117.627 42.224,117.646 42.224,117.865 42.167,117.923 U1.12
  Bottom Layer w0.155: v1(39.525,116.65) 39.605,116.65 39.78,116.475 U2.27
NetU1_13: U1.13 U2.21 | length 8
  Top Layer w0.155: v1(40.829,120.8) cw(c40.829,119.53) 41.5,120.608 ccw(c41.581,120.74) 41.576,120.585 41.581,120.585 cw(c41.564,119.893) 41.92,120.487 42.284,120.271 cw(c42.074,119.917) 42.366,120.208 42.425,120.149 cw(c42.243,119.967) 42.5,119.967 42.5,119.272 ccw(c42.655,119.273) 42.536,119.174 cw(c42.399,119.058) 42.578,119.058 42.578,118.788 cw(c42.399,118.788) 42.399,118.609 42.254,118.609 ccw(c42.254,118.454) 42.108,118.506 42.108,118.481 U1.13
  Bottom Layer w0.155: v1(40.829,120.8) 40.682,120.316 ccw(c40.83,120.271) 40.675,120.271 40.675,119.475 U2.21
NetU1_14: U1.14 U2.23 | length 9.7
  Top Layer w0.155: v1(39.781,119.698) 39.589,120.236 39.589,120.327 39.659,120.432 39.759,120.531 39.759,120.535 39.794,120.666 39.885,120.757 40.21,120.757 40.268,120.748 40.271,120.747 40.349,120.699 cw(c40.268,120.567) 40.41,120.628 ; 40.411,120.628 40.411,120.626 ccw(c40.829,120.8) 40.817,120.348 41.575,120.329 cw(c41.564,119.893) 41.787,120.267 42.153,120.05 cw(c42.074,119.917) 42.183,120.027 ; U1.14 42.166,118.923 42.224,118.98 42.224,119.2 42.243,119.219 42.243,119.967 42.184,120.027
  Bottom Layer w0.155: v1(39.781,119.698) 39.832,118.623 ccw(c39.987,118.63) 39.987,118.475 U2.23
NetU2_5: U2.5 X1.1 | length 3.9
  Top Layer w0.155: X1.1 37.1,121.15 v1(37.1,120.575)
  Bottom Layer w0.155: U2.5 35.925,122.689 v1(37.1,120.575)
NetU2_6: U2.6 X1.3 | length 4.3
  Top Layer w0.155: v1(36.4,124.625) 36.4,123.872 X1.3 37.55,123.625 X1.3@37.798,123.377
  Bottom Layer w0.155: v1(36.4,124.625) 36.425,124.325 U2.6 U2.6@36.425,122.625
NetU2_8: U2.8
NetU2_14: U2.14
NetU2_20: U2.20
NetU2_24: U2.24
NetU2_28: U2.28
NetU2_29: U2.29
NetU2_33: U2.33
NetU2_34: U2.34
NetU2_35: U2.35
NetU2_36: U2.36
NetU2_53: U2.53
NetU2_54: U2.54
VBATT: P4.2 Q1.3 | length 3.1
  Top Layer w0.155: P4.2@36.35,125.825 36.35,126.327 36.546,126.523 36.533,126.535 v1(36.533,127)
  Bottom Layer w0.155: v1(36.533,127) 36.545,126.989 37.234,126.989 37.247,126.976 Q1.3
VIN: C20.2 C23.2 D3.2 Q1.2 R3.2 U6.2 U6.3 U7.2 U7.3 | length 50.2
  Top Layer w0.155: v1(32.075,127.15) 32.075,127.095 31.779,126.799 31.779,121.766 31.87,121.675 R3.2 ; v1(46.025,109.375) v1(47.234,109.443)
  Bottom Layer w0.155: v1(32.075,127.15) 32.45,127.525 32.45,128.275 33.372,128.275 33.551,128.454 35.427,128.454 35.955,127.926 39.288,127.926 39.753,128.391 41.281,128.391 41.826,127.846 46.48,127.846 46.571,127.755 46.571,125.994 47.864,124.701 47.864,123.225 U6.3 U6.2 47.864,119.957 cw(c47.709,119.957) 47.709,119.802 47.264,119.802 ccw(c47.264,119.623) 47.085,119.623 47.085,119.073 ccw(c47.264,119.073) 47.264,118.894 47.709,118.894 cw(c47.709,118.739) 47.864,118.739 47.864,118.226 cw(c47.709,118.227) 47.833,118.134 ccw(c47.975,118.025) 47.796,118.025 47.796,117.025 ccw(c47.975,117.025) 47.832,116.917 cw(c47.709,116.823) 47.863,116.804 47.253,111.819 cw(c47.075,111.841) 47.248,111.796 46.837,110.213 ccw(c47.275,110.1) 46.928,109.81 v1(47.234,109.443) ; U7.3 U7.2 43.111,107.077 43.759,107.725 C23.2 ccw(c45.05,108.7) 46.025,108.7 v1(46.025,109.375)
pads on no net: P2. P2.4 SW1. U1.2 U1.3 U1.4 U1.9 U1.10 U1.11 U2.2 U2.3 U2.9 U2.11 U2.26 U2.43 U2.51 U2.52 U2.55 U2.56 U2.57 U3.4 U5.4

## Polygon pours and split planes (outlines as drawn)
GND on Bottom Layer "BOTTL_GND_P" (solid, pour order 2): 23.425,131.25 23.825,131.65 54.725,131.65 54.725,103.325 52.3,100.9 52.175,101.025 24.025,101.025
GND on Top Layer "BOTTL_GND_P" (solid, pour order 3): 24.025,131.075 54.4,131.075 54.8,130.675 53.225,129.1 53.225,102.15 26.025,102.15 24.225,103.95
3V3 on Layer 2 (split plane): 29,129.49 49,129.49 49.016,129.491 49.217,129.482 49.433,129.454 49.645,129.407 49.852,129.342 50.053,129.258 50.246,129.158 50.429,129.041 50.602,128.909 50.762,128.762 50.909,128.602 51.041,128.429 51.158,128.246 51.258,128.053 51.342,127.852 51.407,127.645 51.454,127.433 51.482,127.217 51.491,127.016 51.49,127 51.49,107 51.491,106.984 51.482,106.783 51.454,106.567 51.407,106.355 51.342,106.148 51.258,105.947 51.158,105.754 51.041,105.571 50.909,105.398 50.762,105.238 50.602,105.091 50.429,104.959 50.246,104.842 50.053,104.742 49.852,104.658 49.645,104.593 49.433,104.546 49.217,104.518 49.016,104.509 49,104.51 29,104.51 28.984,104.509 28.783,104.518 28.567,104.546 28.355,104.593 28.148,104.658 27.947,104.742 27.754,104.842 27.571,104.959 27.398,105.091 27.238,105.238 27.091,105.398 26.959,105.571 26.842,105.754 26.742,105.947 26.658,106.148 26.593,106.355 26.546,106.567 26.518,106.783 26.509,106.984 26.51,107 26.51,127 26.509,127.016 26.518,127.217 26.546,127.433 26.593,127.645 26.658,127.852 26.742,128.053 26.842,128.246 26.959,128.429 27.091,128.602 27.238,128.762 27.398,128.909 27.571,129.041 27.754,129.158 27.947,129.258 28.148,129.342 28.355,129.407 28.567,129.454 28.783,129.482 28.984,129.491
GND on Layer 1 (split plane): 29,129.49 49,129.49 49.016,129.491 49.217,129.482 49.433,129.454 49.645,129.407 49.852,129.342 50.053,129.258 50.246,129.158 50.429,129.041 50.602,128.909 50.762,128.762 50.909,128.602 51.041,128.429 51.158,128.246 51.258,128.053 51.342,127.852 51.407,127.645 51.454,127.433 51.482,127.217 51.491,127.016 51.49,127 51.49,107 51.491,106.984 51.482,106.783 51.454,106.567 51.407,106.355 51.342,106.148 51.258,105.947 51.158,105.754 51.041,105.571 50.909,105.398 50.762,105.238 50.602,105.091 50.429,104.959 50.246,104.842 50.053,104.742 49.852,104.658 49.645,104.593 49.433,104.546 49.217,104.518 49.016,104.509 49,104.51 29,104.51 28.984,104.509 28.783,104.518 28.567,104.546 28.355,104.593 28.148,104.658 27.947,104.742 27.754,104.842 27.571,104.959 27.398,105.091 27.238,105.238 27.091,105.398 26.959,105.571 26.842,105.754 26.742,105.947 26.658,106.148 26.593,106.355 26.546,106.567 26.518,106.783 26.509,106.984 26.51,107 26.51,127 26.509,127.016 26.518,127.217 26.546,127.433 26.593,127.645 26.658,127.852 26.742,128.053 26.842,128.246 26.959,128.429 27.091,128.602 27.238,128.762 27.398,128.909 27.571,129.041 27.754,129.158 27.947,129.258 28.148,129.342 28.355,129.407 28.567,129.454 28.783,129.482 28.984,129.491

## Silkscreen, mask and mechanical layers (free items; w line width, h text height)
Top Overlay:
  lines w0.4: 43.2,117.8 44.075,118.675 44.95,117.8
  text "G" at 41.1,106.075 h0.65
  text "5" at 42.525,106.075 h0.65
  text "R" at 43.675,106.075 h0.65
  text "T" at 46.038,106.075 h0.65
Bottom Overlay:
  text "JLCJLCJLCJLC" at 41.295,120.71 h0.8 r45
Board_outline:
  the board outline again, w0.15